# Allegro board fmc_tlu_cfd_05.brd
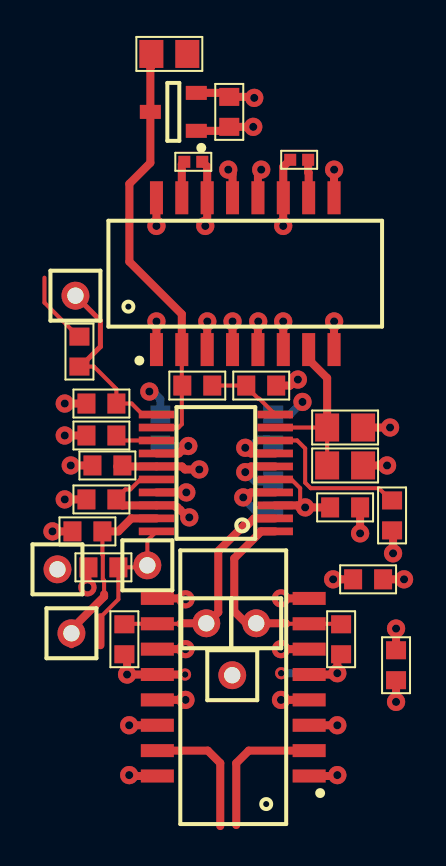
[diagram p0: board, top side]
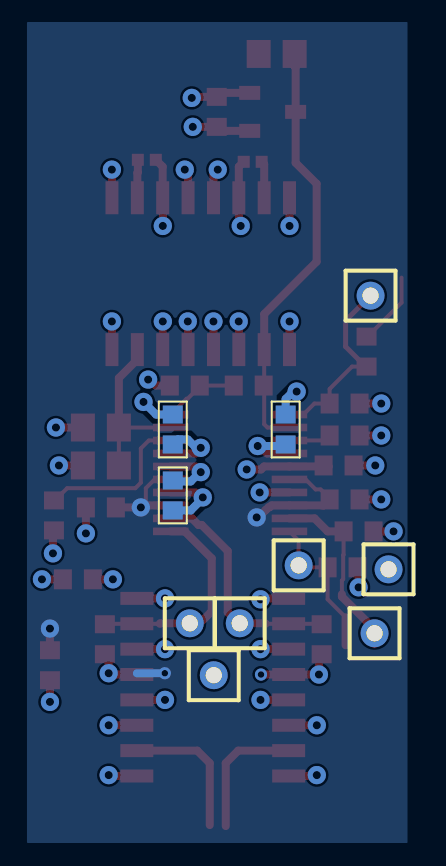
[diagram p1: board, bottom side, seen from below]

No outline. copper layers: TOP, LAYER2, LAYER3, LAYER4, LAYER5, BOTTOM. Coordinates in mm from the lowest, leftmost part position.

## Design rules (mm)
constraint set DEFAULT: min track width 0.17, pair gap 0.18

## Placement (name value [footprint] x y rotation side)
C1  100nF  [C0603]  8.6 28.8 90 top
C2  10nF  [C0603]  2.2 14.2 0 top
C3  1.0uF  [C0603]  16.95 1.1 90 top
C4  1.0uF  [C0603]  15.55 5.4 0 top
C5  100nF  [C0603]  14.4 9 180 top
C6  1.0uF  [C0603]  2.5 11.1 0 top
C7  100nF  [C0603]  10.8 12.9 270 bottom
C8  100nF  [C0603]  2.2 9.4 0 top
C9  100nF  [C0603]  10.8 9.6 90 bottom
C10  100nF  [C0603]  5.15 12.9 270 bottom
D1  -  [SOT95P240X130-3N]  5.8 28.8 180 top
IC1  -  [SOIC127P835X237-16N]  9.4 20.7 90 top
IC2  -  [TSSOP20MA_065]  10.9 7.8 90 top
IC3  -  [SOIC127P835X237-16N]  8.8 0 180 top
R1  51  [C0402]  6.8 26.3 180 top
R2  12  [C0805]  5.6 31.7 180 top
R3  51  [C0603]  7 15.1 0 top
R4  51  [C0402]  12.1 26.4 0 top
R5  100  [C0603]  1.1 16.8 270 top
R6  100  [C0805]  14.4 13 180 top
R7  100  [C0603]  10.2 15.1 180 top
R8  100  [C0805]  14.4 11.1 180 top
R9  33k  [C0603]  2.2 12.6 0 top
R10  XX  [C0603]  16.75 8.6 90 top
R11  75  [C0603]  1.5 7.8 0 top
R12  75  [C0603]  3.35 2.4 90 top
R13  75  [C0603]  2.3 6 0 top
R14  75  [C0603]  14.2 2.4 90 top
TP1  -  [TP_HOLE_08]  0.9 19.6 0 top
TP2  -  [TP_HOLE_08]  4.5 6.1 0 top
TP3  -  [TP_HOLE_08]  0.7 2.7 0 top
TP4  -  [TP_HOLE_08]  0 5.9 0 top
TP5  -  [TP_HOLE_08]  9.95 3.2 0 top
TP6  -  [TP_HOLE_08]  7.45 3.2 0 top
TP7  -  [TP_HOLE_08]  8.75 0.6 0 top

## Library data of the parts
C1 C5 C7-C10 = CAPCERSMDCL2: part number: CAPCERSMDCL2_0603-100NF,16V; tolerance: 10%
C2 = CAPCERSMDCL2: part number: CAPCERSMDCL2_0603-10NF,50V; tolerance: 10%
C3 C4 C6 = CAPCERSMDCL2: part number: CAPCERSMDCL2_0603-1.0UF,6.3V; tolerance: 10%
D1 = DIODE_DUAL_SERIES: part number: HBAT-540C
IC1 = DELAY_LINE_GL2L: part number: GL2L5LS050D-C
IC2 = MAX9601
IC3 = DELAY_LINE_GL2L: part number: GL2L5LS100D-C
R1 R4 = RSMD0402: part number: RSMD0402_1/16W-51,1%; tolerance: 1%
R2 = RSMD0805: part number: RSMD0805_125MW-12,1%; tolerance: 1%
R3 = RSMD0603: part number: RSMD0603_1/10W-51,1%; tolerance: 1%
R5 R7 = RSMD0603: part number: RSMD0603_1/10W-100,1%; tolerance: 1%
R6 R8 = RSMD0805: part number: RSMD0805_125MW-100,1%; tolerance: 1%
R9 = RSMD0603: part number: RSMD0603_1/10W-33K,1%; tolerance: 1%
R10 = RSMD0603: part number: RSMD0603_1/10W-XX,1%; tolerance: 1%
R11-R14 = RSMD0603: part number: RSMD0603_1/10W-75,1%; tolerance: 1%
TP1-TP7 = TP: part number: TP_HOLE-0.8MM

## Footprints (pads in the part's own frame, mm; a bottom-side part is the same pattern mirrored in y, then rotated)
C0402
  rect 0.6x0.6 smd: 1(-0.45,0) 2(0.45,0)
C0603
  rect 0.9x1 smd: 1(-0.75,0) 2(0.75,0)
C0805
  rect 1.2x1.4 smd: 1(-0.9,0) 2(0.9,0)
SOIC127P835X237-16N
  rect 1.65x0.65 smd: 1(-3.8,4.445) 2(-3.8,3.175) 3(-3.8,1.905) 4(-3.8,0.635) 5(-3.8,-0.635) 6(-3.8,-1.905) 7(-3.8,-3.175) 8(-3.8,-4.445) 9(3.8,-4.445) 10(3.8,-3.175) 11(3.8,-1.905) 12(3.8,-0.635) 13(3.8,0.635) 14(3.8,1.905) 15(3.8,3.175) 16(3.8,4.445)
SOT95P240X130-3N
  rect 1.05x0.7 smd: 1(-1.15,0.95) 2(-1.15,-0.95) 3(1.15,0)
TP_HOLE_08
  round 1.397 hole 0.813: 1(0,0)
TSSOP20MA_065
  rect 0.381x1.778 smd: 1(0,0) 2(0.65,0) 3(1.3,0) 4(1.95,0) 5(2.6,0) 6(3.25,0) 7(3.9,0) 8(4.55,0) 9(5.2,0) 10(5.85,0) 11(5.85,5.94) 12(5.2,5.94) 13(4.55,5.94) 14(3.9,5.94) 15(3.25,5.94) 16(2.6,5.94) 17(1.95,5.94) 18(1.3,5.94) 19(0.65,5.94) 20(0,5.94)

## Nets
GND_SIGNAL: C2.1(A<0>) C3.1(A<0>) C4.1(A<0>) C5.1(A<0>) C6.1(A<0>) C7.1(A<0>) C8.1(A<0>) C9.1(A<0>) C10.1(A<0>) IC1.1(SH<0>) IC1.3(SH<1>) IC1.4(SH<2>) IC1.5(SH<3>) IC1.6(SH<4>) IC1.8(SH<5>) IC1.9(SH<6>) IC1.11(SH<7>) IC1.12(SH<8>) IC1.13(SH<9>) IC1.14(SH<10>) IC1.16(SH<11>) IC2.4(LE<0>) IC2.17(LE<0>) IC3.1(SH<0>) IC3.3(SH<1>) IC3.4(SH<2>) IC3.5(SH<3>) IC3.6(SH<4>) IC3.8(SH<5>) IC3.9(SH<6>) IC3.11(SH<7>) IC3.12(SH<8>) IC3.13(SH<9>) IC3.14(SH<10>) IC3.16(SH<11>) R1.1(A<0>) R4.1(A<0>) R6.1(A<0>) R7.1(A<0>) R8.1(A<0>) R9.1(A<0>) R10.1(A<0>) R11.1(A<0>) R12.1(A<0>) R13.1(A<0>) R14.1(A<0>) TP4.1(A<0>) TP7.1(A<0>)
P2V5: C3.2(B<0>) C5.2(B<0>) C8.2(B<0>) IC2.3(VCCO_<0>) IC2.5(LE*<0>) IC2.16(LE*<0>) IC2.18(VCCO_<1>)
P5V: C1.2(B<0>) C4.2(B<0>) C7.2(B<0>) C10.2(B<0>) D1.2(C) IC2.7(VCC<0>) IC2.14(VCC<1>)
VIN: R2.1(A<0>)
CFD_OUT: IC3.2(A1)
CFD_OUT*: IC3.15(A2)
LEADING_EDGE_OUT: IC2.20(Q<0>) R13.2(B<0>) TP2.1(A<0>)
LEADING_EDGE_OUT*: IC2.19(Q*<0>) R11.2(B<0>) TP3.1(A<0>)
M5V: C1.1(A<0>) C6.2(B<0>) C9.2(B<0>) D1.1(A) IC2.6(VEE<0>) IC2.15(VEE<1>)
UNNAMED_1_CAPCERSMDCL2_I78_B: C2.2(B<0>) IC2.11(IN+<0>) R5.2(B<0>) TP1.1(A<0>)
UNNAMED_1_DELAYLINEGL2L_I140_A1: D1.3(AC) IC1.2(A1) IC2.12(IN-<0>) R2.2(B<0>) R3.1(A<0>)
UNNAMED_1_DELAYLINEGL2L_I140_A2: IC1.15(A2) R1.2(B<0>)
UNNAMED_1_DELAYLINEGL2L_I140_B2: IC1.10(B2) R4.2(B<0>)
UNNAMED_1_MAX9601_I1_HYS: IC2.8(HYS<0>) R10.2(B<0>)
UNNAMED_1_MAX9601_I1_IN: IC2.10(IN+<0>) R3.2(B<0>) R7.2(B<0>)
UNNAMED_1_MAX9601_I1_IN_1: IC1.7(B1) IC2.9(IN-<0>) R6.2(B<0>) R8.2(B<0>)
UNNAMED_1_MAX9601_I1_Q: IC2.2(Q*<0>) IC3.10(B2) R12.2(B<0>) TP6.1(A<0>)
UNNAMED_1_MAX9601_I1_Q_1: IC2.1(Q<0>) IC3.7(B1) R14.2(B<0>) TP5.1(A<0>)
UNNAMED_1_MAX9601_I71_HYS: IC2.13(HYS<0>) R9.2(B<0>)
VTHRESH: R5.1(A<0>)

## Via types
v1: diameter 0.61, hole 0.33, TOP to BOTTOM, 2 vias
v2: diameter 0.914, hole 0.406, TOP to BOTTOM, 51 vias

## Routing (per net, layer and track width the routed paths; a pad name or vN(x,y) marks a point on that pad's centre or on a via; arc(x,y) is an arc through that point)
GND_SIGNAL: length 78.7
  TOP w0.4: C5.1 v2(15.15,7.7) ; R1.1 7.49,26.05 IC1.14 7.49,23.2 7.4,23.1 v2(7.4,23.09) ; C3.1 v2(16.95,-0.74) ; C8.1 v2(0.36,9.4) ; 12.6,-0.64 v2(11.19,-0.64) ; 5,-0.64 v2(6.41,-0.64) ; IC1.4 v2(8.76,18.31) ; R11.1 v2(-0.25,7.8) ; IC1.6 11.3,18.29 11.3,18.3 v2(11.3,18.31) ; C2.1 v2(0.36,14.2) ; C4.1 v2(13.8,5.4) ; IC3.3 v2(14.01,-1.91) ; R7.1 11.65,15.1 11.95,15.4 v2(12.04,15.4) ; 4.95,16.9 v2(4.95,18.31) ; IC3.16 3.84,-4.45 3.8,-4.4 v2(3.59,-4.4) ; 12.6,4.44 v2(11.19,4.44) ; R14.1 14.01,1.46 v2(14.01,0.7) 13.75,0.7 13.68,0.63 IC3.5 ; IC3.6 v2(11.19,1.9) ; 10.04,16.9 10.04,18.18 10.05,18.2 v2(10.05,18.31) ; IC2.17 v2(6.45,9.75) ; v2(8.55,25.91) 8.55,25.9 8.76,25.68 8.76,24.5 ; R10.1 16.75,7.66 16.8,7.61 v2(16.8,6.7) ; v2(11.3,23.09) 11.3,24.49 11.3,24.5 11.3,26.05 R4.1 ; IC3.1 13.75,-4.45 13.8,-4.4 v2(14.01,-4.4) ; R6.1 v2(16.65,13) ; v1(6.38,0.63) IC3.12 v2(3.48,0.63) 3.48,1.51 R12.1 ; R9.1 v2(0.36,12.6) ; v2(10.2,25.91) 10.2,25.9 10.04,25.73 IC1.12 ; v2(6.41,4.4) 6.15,4.4 6.1,4.44 5,4.44 ; 7.49,16.9 7.49,18.2 7.5,18.2 v2(7.5,18.31) ; 13.84,24.5 13.84,25.8 13.85,25.8 v2(13.85,25.91) ; IC3.11 v2(6.41,1.9) ; C6.1 v2(0.66,11.1) ; v2(13.85,18.31) 13.85,18.2 13.84,18.2 IC1.8 ; R8.1 v2(16.5,11.1) ; IC1.16 v2(4.95,23.09) ; IC3.14 v2(3.59,-1.91) ; v2(9.3,9.5) 9.43,9.5 9.68,9.75 IC2.4 ; 1.5,6.2 v2(1.5,5)
  LAYER2 w0.17: TP7.1 8.75,1.48 ; TP7.1 8.75,-0.28 ; TP7.1 7.87,0.6 ; TP7.1 9.63,0.6 ; TP4.1 0.88,5.9 ; TP4.1 0,5.02 ; TP4.1 -0.88,5.9 ; TP4.1 0,6.78
  LAYER5 w0.17: TP4.1 0.88,5.9 ; TP4.1 0,6.78 ; TP4.1 0,5.02 ; TP4.1 -0.88,5.9 ; TP7.1 8.75,1.48 ; TP7.1 7.87,0.6 ; TP7.1 8.75,-0.28 ; TP7.1 9.63,0.6
  BOTTOM w0.4: C7.1 11.64,13.65 v2(12.27,14.28) ; v2(4.6,14.8) 4.78,14.8 5.15,14.43 C10.1 ; C9.1 9.9,8.85 9.3,9.45 v2(9.3,9.5)
P2V5: length 14.2
  TOP w0.2: IC2.5 11.71,10.4 12.15,9.96 12.15,9.25 v2(12.4,9) ; IC2.16 4.15,10.4 3.65,9.9 3.4,9.9 2.95,9.45
  TOP w0.4: v2(16.95,2.93) C3.2 ; IC2.3 12.02,9.1 12.12,9 v2(12.4,9) C5.2 ; 2.95,9.45 C8.2 3.25,9.1 IC2.18 5.86,9.1 5.95,9.01 6,9.01 6.14,8.87 6.15,8.87 6.52,8.5 v2(6.6,8.5)
  BOTTOM w0.4: 12.6,0.7 v1(11.2,0.7)
P5V: length 10.5
  TOP w0.4: C4.2 v2(17.35,5.4) ; v2(6.55,12.07) 6.34,11.86 6.24,11.86 6.08,11.7 IC2.14 ; IC2.7 9.68,11.7 v2(9.4,11.98) ; D1.2 8.4,29.75 C1.2 9.8,29.55 v2(9.85,29.5)
  BOTTOM w0.4: v2(9.4,11.98) 9.63,11.98 10.05,12.4 10.55,12.4 C7.2 ; v2(6.55,12.07) 5.23,12.07 C10.2
CFD_OUT: length 7
  TOP w0.4: 8.95,-6.9 8.95,-3.8 9.57,-3.18 IC3.2
CFD_OUT*: length 6.6
  TOP w0.4: IC3.15 7.52,-3.18 8.15,-3.8 8.15,-6.95
LEADING_EDGE_OUT: length 7.7
  TOP w0.2: IC2.20 4.5,7.34 TP2.1 4.4,6 R13.2 3.05,4.4 2.15,3.5
  TOP w0.4: 2.15,3.5 2.15,2.1
LEADING_EDGE_OUT*: length 9.3
  TOP w0.2: R11.2 2.25,6.63 2.27,6.61 2.27,5.41 2.33,5.35 2.33,4.65
  TOP w0.4: R11.2 3.05,7.8 3.7,8.45 IC2.19 ; 0.7,2.15 TP3.1 0.7,2.9 2.33,4.54 2.33,4.65
M5V: length 10.6
  TOP w0.4: v2(9.4,10.77) 9.68,11.05 IC2.6 ; C6.2 3,11.05 IC2.15 6.23,11.05 6.38,10.9 v2(7.1,10.9) ; v2(9.8,28.05) C1.1 8.52,28.05 8.4,27.93 8.12,27.85 D1.1
  BOTTOM w0.4: v2(9.4,10.77) 9.43,10.77 9.9,10.3 10.75,10.3 C9.2
UNNAMED_1_CAPCERSMDCL2_I78_B: length 9.8
  TOP w0.2: IC2.11 4.26,13.65 3.71,14.2 C2.2 2.95,14.93 1.83,16.05 1.15,16.05
  TOP w0.25: TP1.1 2.15,18.35 2.15,17.05 1.15,16.05 R5.2
UNNAMED_1_DELAYLINEGL2L_I140_A1: length 21.4
  TOP w0.2: 6.22,15.07 6.22,13.16 6.06,13 IC2.12 ; 6.22,15.07 IC1.2 ; 6.22,15.07 R3.1
  TOP w0.4: IC1.2 6.22,18.67 3.6,21.3 3.6,25.2 4.65,26.25 D1.3 4.65,31.02 4.7,31.07 R2.2
UNNAMED_1_DELAYLINEGL2L_I140_A2: length 1.9
  TOP w0.4: 6.22,24.5 6.22,26.17 R1.2
UNNAMED_1_DELAYLINEGL2L_I140_B2: length 1.9
  TOP w0.4: IC1.10 12.57,25.75 12.55,25.77 R4.2
UNNAMED_1_MAX9601_I1_HYS: length 8.1
  TOP w0.2: IC2.8 12,12.35 12.4,11.95 12.4,10.24 12.68,9.96 16.09,9.96 16.7,9.35 R10.2
UNNAMED_1_MAX9601_I1_IN: length 3.8
  TOP w0.2: R3.2 R7.2 9.45,15.05 10.06,14.44 10.11,14.44 IC2.10
UNNAMED_1_MAX9601_I1_IN_1: length 8.8
  TOP w0.2: R8.2 R6.2 13.5,13.1 13.4,13 IC2.9
  TOP w0.4: 12.57,16.9 12.57,16.4 13.5,15.47 13.5,13.1
UNNAMED_1_MAX9601_I1_Q: length 11.5
  TOP w0.2: R12.2 3.37,3.17 IC3.10 6.15,3.17
  TOP w0.4: 6.15,3.17 6.18,3.2 TP6.1 7.5,3.2 8.05,3.75 8.05,6.82 9.36,8.12 9.51,8.12 9.84,8.45 IC2.2
UNNAMED_1_MAX9601_I1_Q_1: length 10.9
  TOP w0.2: 11.45,3.17 IC3.7 14.17,3.17 R14.2
  TOP w0.4: 11.45,3.17 11.42,3.2 TP5.1 9.45,3.2 8.85,3.8 8.85,6.45 10.2,7.8 IC2.1
UNNAMED_1_MAX9601_I71_HYS: length 2.1
  TOP w0.2: R9.2 3.2,12.35 IC2.13
VTHRESH: length 3.7
  TOP w0.2: -0.65,20.5 -0.65,19.25 1.05,17.55 R5.1

## Copper pours and planes (outline as drawn; the poured copper is in the pictures)
GND_SIGNAL on LAYER2, LAYER5: -0.95,33.3 -0.95,-7.8 18.1,-7.8 18.1,33.3
P2V5 on BOTTOM: -0.95,-7.8 18.1,-7.8 18.1,33.3 -0.95,33.3
P5V on LAYER3: -0.95,33.3 -0.95,-7.8 18.1,-7.8 18.1,33.3
M5V on LAYER4: -0.95,33.3 -0.95,-7.8 18.1,-7.8 18.1,33.3
